# EAGLE board power system with extra pads (EAGLE 7.1.0)
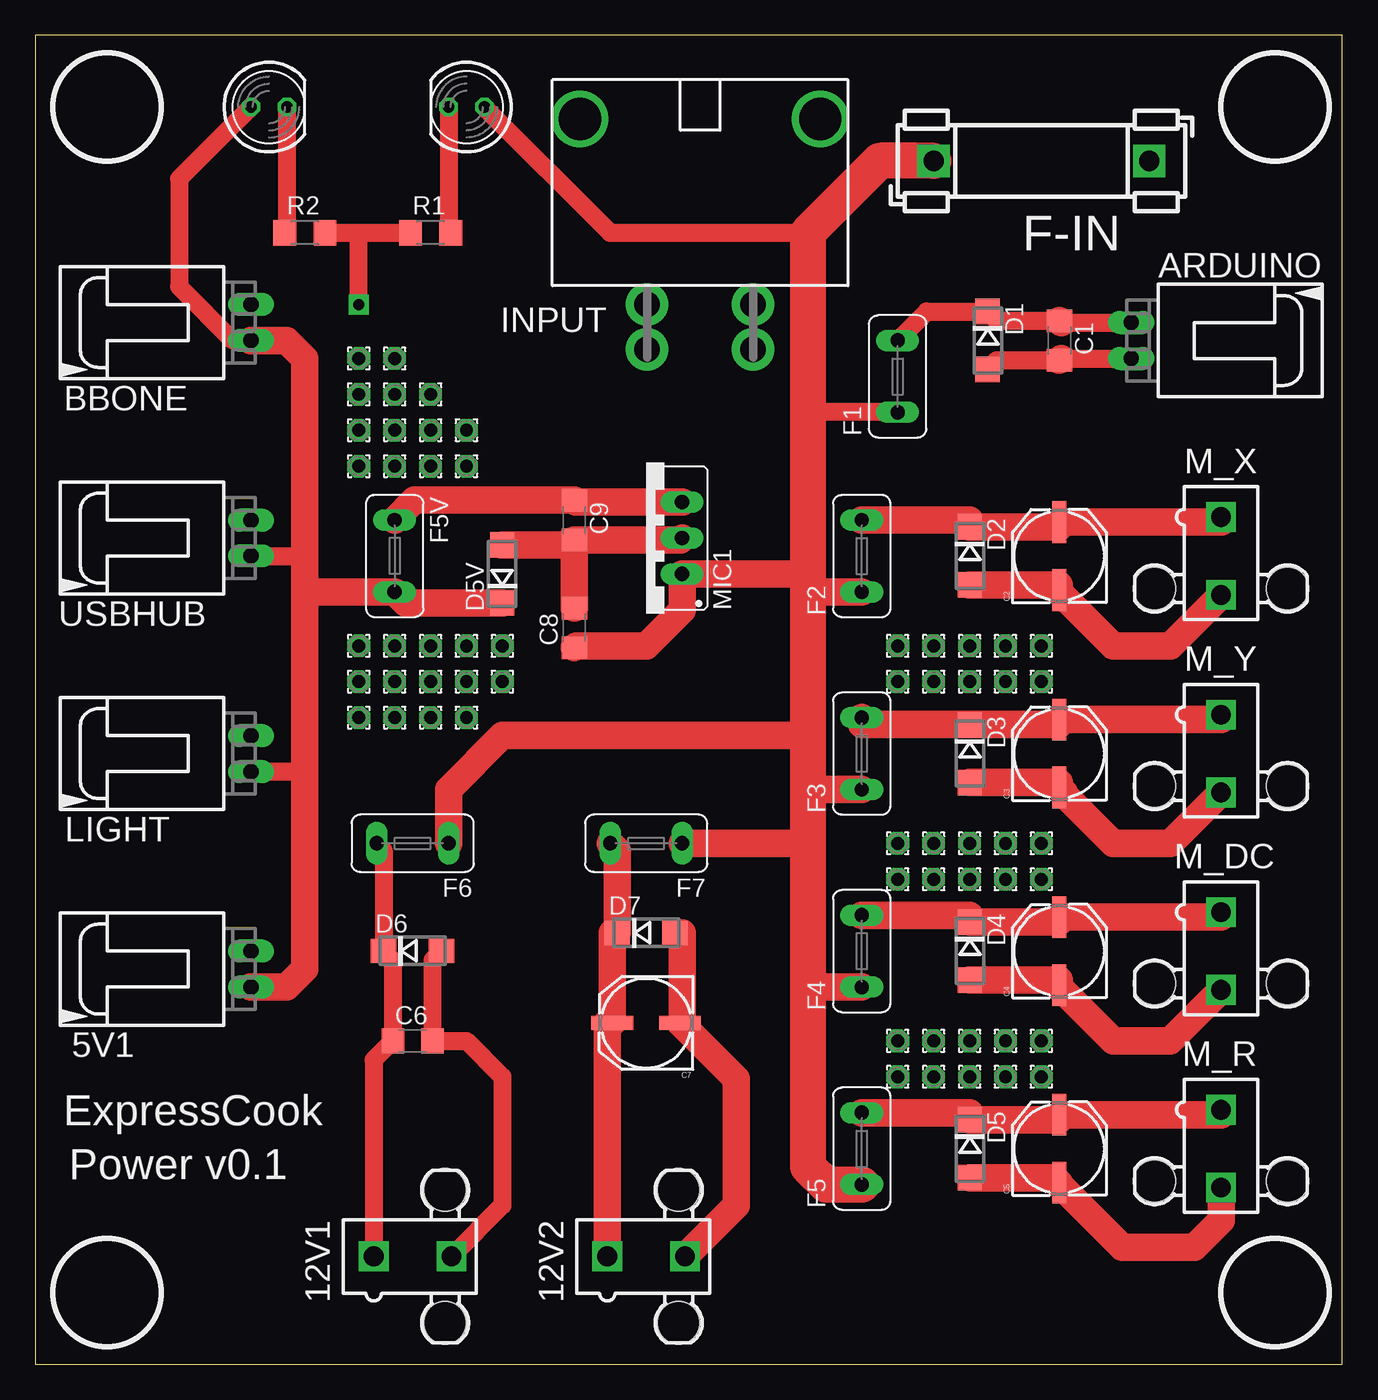
[diagram p0: board, top side]
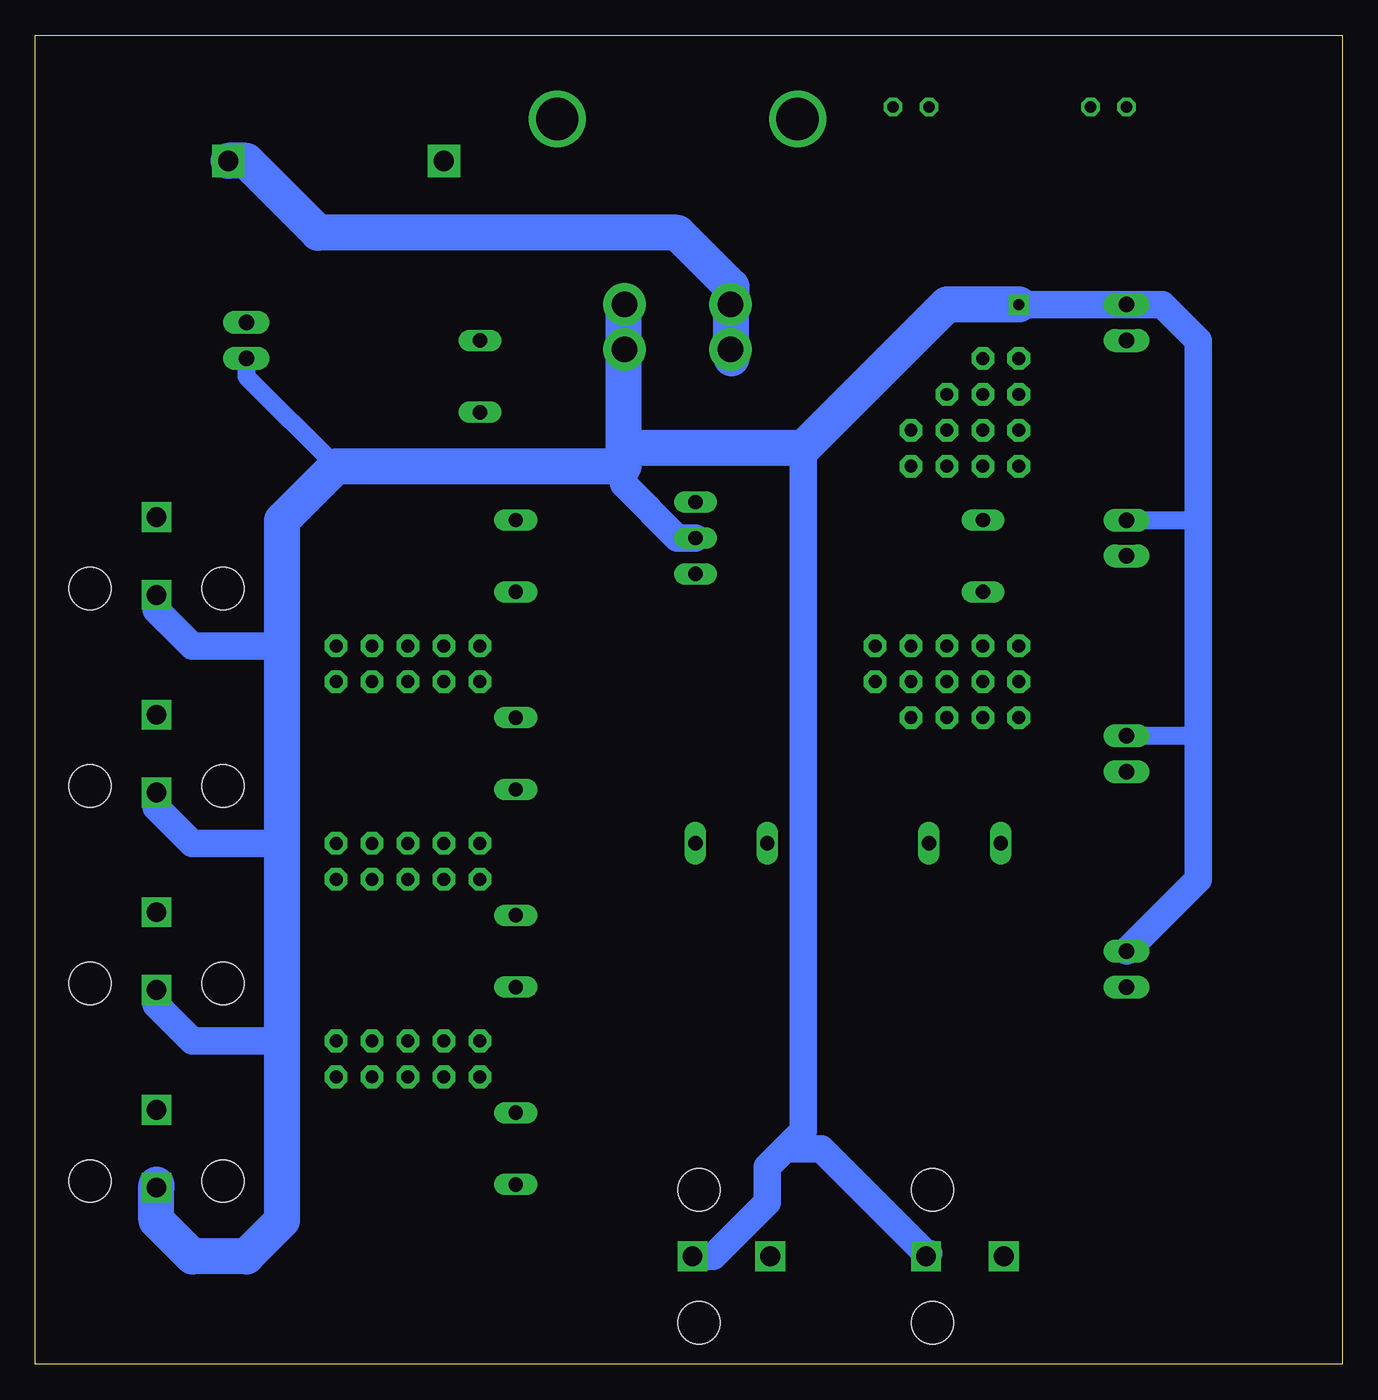
[diagram p1: board, bottom side, seen from below]

Size 92.38 x 93.97 mm. Coordinates in mm from the lower left corner, seen from the top.
Outline: 0,0 92.38,0 92.38,93.97 0,93.97 0,0
Copper layers (1*16): Top 0.035mm / dielectric 1.5mm / Bottom 0.035mm
Design rules "default": minimum track width 10mil, minimum drill 24mil, track to track 8mil, track to pad 8mil, pad to pad 8mil, via to via 8mil, smd to smd 8mil, copper to edge 40mil, drill to drill 8mil, minimum pad ring 10mil, minimum via ring 8mil, stop-mask expansion 4mil, vias tented up to drill 0mil, thermal gap 10mil

## Footprints (pad centres in the part's own frame; a part is rotated, then mirrored left to right if it is on the bottom)
70553-02 = drill 1.092 long: 1 -1.27,-7.62; 2 1.27,-7.62
5566-2 = drill 1.4 square: 1 0,-2.75; 2 0,2.75 | hole 3: 4.7,2.29; -4.7,2.29
C1206 = smd 1.6 x 1.8: 1 -1.4,0; 2 1.4,0
NIPPON_F80 = smd 2.95 x 1: + 2.4,0; - -2.4,0
DO214AC = smd 1.8 x 1.7: A 2.05,0; C -2.05,0
1,6/0,9 = drill 0.914 pad 1.6 octagon: 1 0,0
TE5 = drill 1.016 long: 1 -2.54,0; 2 2.54,0
FUSE_HOLDER_5X20MM = drill 1.422 pad 2.286 square: 1 0,0; 2 15.24,0
43160-XX02 = drill 1.8 pad 3: 1@1 -3.745,0; 1@2 -3.745,3.18; 2@1 3.745,0; 2@2 3.745,3.18 | drill 3 pad 3.4: M1 -8.495,-13.13; M2 8.495,-13.13
LED5MM = drill 0.813 octagon: A -1.27,0; K 1.27,0
TO220CS = drill 1.016 long: GND 0,-2.54; IN -2.54,-2.54; OUT 2.54,-2.54
R1206 = smd 1.6 x 1.803: 1 -1.422,0; 2 1.422,0

## Placement (x,y rotation side)
5V1  C-GRID-02-70553  [70553-02]  7.62,27.94 90 top
12V1  5566-2  [5566-2]  26.67,7.62 270 top
12V2  5566-2  [5566-2]  43.18,7.62 270 top
ARDUINO  C-GRID-02-70553  [70553-02]  85.09,72.39 270 top
BBONE  C-GRID-02-70553  [70553-02]  7.62,73.66 90 top
C1  10uF  [C1206]  72.39,72.39 270 top
C2  220uF  [NIPPON_F80]  72.39,57.15 90 top
C3  220uF  [NIPPON_F80]  72.39,43.18 90 top
C4  220uF  [NIPPON_F80]  72.39,29.21 90 top
C5  220uF  [NIPPON_F80]  72.39,15.24 90 top
C6  10uF  [C1206]  26.67,22.86 0 top
C7  220uF  [NIPPON_F80]  43.18,24.13 180 top
C8  0.2uF  [C1206]  38.1,52.07 90 top
C9  10uF  [C1206]  38.1,59.69 270 top
D1  12v  [DO214AC]  67.31,72.39 270 top
D2  12v  [DO214AC]  66.04,57.15 270 top
D3  12v  [DO214AC]  66.04,43.18 270 top
D4  12v  [DO214AC]  66.04,29.21 270 top
D5  12v  [DO214AC]  66.04,15.24 270 top
D5V  5v  [DO214AC]  33.02,55.88 90 top
D6  12v  [DO214AC]  26.67,29.21 0 top
D7  12v  [DO214AC]  43.18,30.48 0 top
E$1  [1,6/0,9]  22.86,50.8 0 top
E$2  [1,6/0,9]  25.4,50.8 0 top
E$3  [1,6/0,9]  27.94,50.8 0 top
E$4  [1,6/0,9]  30.48,50.8 0 top
E$5  [1,6/0,9]  33.02,50.8 0 top
E$6  [1,6/0,9]  33.02,48.26 0 top
E$7  [1,6/0,9]  30.48,48.26 0 top
E$8  [1,6/0,9]  27.94,48.26 0 top
E$9  [1,6/0,9]  25.4,48.26 0 top
E$10  [1,6/0,9]  22.86,48.26 0 top
E$11  [1,6/0,9]  22.86,45.72 0 top
E$12  [1,6/0,9]  25.4,45.72 0 top
E$13  [1,6/0,9]  27.94,45.72 0 top
E$14  [1,6/0,9]  30.48,45.72 0 top
E$15  [1,6/0,9]  60.96,36.83 0 top
E$16  [1,6/0,9]  60.96,34.29 0 top
E$17  [1,6/0,9]  63.5,34.29 0 top
E$18  [1,6/0,9]  63.5,36.83 0 top
E$19  [1,6/0,9]  66.04,36.83 0 top
E$20  [1,6/0,9]  66.04,34.29 0 top
E$21  [1,6/0,9]  68.58,34.29 0 top
E$22  [1,6/0,9]  68.58,36.83 0 top
E$23  [1,6/0,9]  71.12,36.83 0 top
E$24  [1,6/0,9]  60.96,22.86 0 top
E$25  [1,6/0,9]  63.5,22.86 0 top
E$26  [1,6/0,9]  66.04,22.86 0 top
E$27  [1,6/0,9]  68.58,22.86 0 top
E$28  [1,6/0,9]  71.12,22.86 0 top
E$29  [1,6/0,9]  71.12,20.32 0 top
E$30  [1,6/0,9]  68.58,20.32 0 top
E$31  [1,6/0,9]  66.04,20.32 0 top
E$32  [1,6/0,9]  63.5,20.32 0 top
E$33  [1,6/0,9]  60.96,20.32 0 top
E$34  [1,6/0,9]  22.86,71.12 0 top
E$35  [1,6/0,9]  25.4,71.12 0 top
E$36  [1,6/0,9]  22.86,68.58 0 top
E$37  [1,6/0,9]  25.4,68.58 0 top
E$38  [1,6/0,9]  27.94,68.58 0 top
E$39  [1,6/0,9]  22.86,66.04 0 top
E$40  [1,6/0,9]  25.4,66.04 0 top
E$41  [1,6/0,9]  27.94,66.04 0 top
E$42  [1,6/0,9]  30.48,66.04 0 top
E$43  [1,6/0,9]  22.86,63.5 0 top
E$44  [1,6/0,9]  25.4,63.5 0 top
E$45  [1,6/0,9]  27.94,63.5 0 top
E$46  [1,6/0,9]  30.48,63.5 0 top
E$47  [1,6/0,9]  71.12,34.29 0 top
E$48  [1,6/0,9]  60.96,50.8 0 top
E$49  [1,6/0,9]  60.96,48.26 0 top
E$50  [1,6/0,9]  63.5,48.26 0 top
E$51  [1,6/0,9]  63.5,50.8 0 top
E$52  [1,6/0,9]  66.04,50.8 0 top
E$53  [1,6/0,9]  66.04,48.26 0 top
E$54  [1,6/0,9]  68.58,48.26 0 top
E$55  [1,6/0,9]  68.58,50.8 0 top
E$56  [1,6/0,9]  71.12,50.8 0 top
E$57  [1,6/0,9]  71.12,48.26 0 top
F1  2A  [TE5]  60.96,69.85 90 top
F2  3A  [TE5]  58.42,57.15 90 top
F3  3A  [TE5]  58.42,43.18 90 top
F4  4A  [TE5]  58.42,29.21 90 top
F5  2A  [TE5]  58.42,15.24 90 top
F5V  5A  [TE5]  25.4,57.15 270 top
F6  2A  [TE5]  26.67,36.83 180 top
F7  2A  [TE5]  43.18,36.83 180 top
F-IN  15A  [FUSE_HOLDER_5X20MM]  78.74,85.09 180 top
INPUT  43160-1102  [43160-XX02]  46.99,74.93 180 top
LED  12v  [LED5MM]  30.48,88.9 180 top
LED2  5v  [LED5MM]  16.51,88.9 0 top
LIGHT  C-GRID-02-70553  [70553-02]  7.62,43.18 90 top
M_DC  5566-2  [5566-2]  83.82,29.21 180 top
M_R  5566-2  [5566-2]  83.82,15.24 180 top
M_X  5566-2  [5566-2]  83.82,57.15 180 top
M_Y  5566-2  [5566-2]  83.82,43.18 180 top
MIC1  MIC29300  [TO220CS]  43.18,58.42 90 top
R1  1200  [R1206]  27.94,80.01 0 top
R2  250  [R1206]  19.05,80.01 0 top
USBHUB  C-GRID-02-70553  [70553-02]  7.62,58.42 90 top

## Library data of the parts
5V1 ARDUINO BBONE LIGHT USBHUB = con-molex; OC_FARNELL: unknown; OC_NEWARK: unknown
12V1 12V2 M_DC M_R M_X M_Y = con-molex; OC_FARNELL: 1822072; OC_NEWARK: unknown
C1 C6 C8 C9 = resistor
C2-C5 C7 = SparkFun-Capacitors
D1-D5 D5V D6 D7 = diode
E$1-E$57 = wirepad
F1-F5 F5V F6 F7 F-IN = fuse; OC_FARNELL: unknown; OC_NEWARK: unknown
INPUT = con-molex; MF: WALDOM/MOLEX; MPN: 43160-1102; OC_FARNELL: unknown; OC_NEWARK: 54H0255
LED LED2 = led
MIC1 = Powerlib
R1 R2 = eagle-ltspice; SPICEMODEL: NONE; SPICEPREFIX: R

## Nets
GND: 5V1.2 12V1.2 12V2.2 ARDUINO.2 BBONE.2 C1.2 C2.- C3.- C4.- C5.- C6.2 C7.- C8.2 C9.2 D1.A D2.A D3.A D4.A D5.A D5V.A D6.A D7.A INPUT.1@1 LIGHT.2 M_DC.2 M_R.2 M_X.2 M_Y.2 MIC1.GND R1.1 R2.2 USBHUB.2
N$2: ARDUINO.1 C1.1 D1.C F1.2
N$3: F-IN.1 INPUT.2@1
N$4: C2.+ D2.C F2.2 M_X.1
N$5: 5V1.1 BBONE.1 D5V.C F5V.2 LED2.A LIGHT.1 USBHUB.1
N$6: C3.+ D3.C F3.2 M_Y.1
N$7: C9.1 F5V.1 MIC1.OUT
N$8: C8.1 F1.1 F2.1 F3.1 F4.1 F5.1 F6.1 F7.1 F-IN.2 LED.A MIC1.IN
N$9: LED2.K R2.1
N$12: C4.+ D4.C F4.2 M_DC.1
N$14: LED.K R1.2
N$15: C5.+ D5.C F5.2 M_R.1
N$17: 12V1.1 C6.1 D6.C F6.2
N$19: 12V2.1 C7.+ D7.C F7.2

## Tracks (layer width: path | path; a pad name or v marks a point on that pad's centre or on a via)
GND  (via drill 0.8 pad 1.42)
  Top 0.254: D7.A 45.72,30.48
  Top 1.27: D1.A 67.96,70.99 C1.2 | 72.52,71.12 ARDUINO.2 | D6.A 28.07,28.56 C6.2 30.48,22.86 33.02,20.32 33.02,11.22 12V1.2 | R2.2 22.86,80.01 | 22.86,80.01 R1.1 | v22.86,74.93 22.86,80.01
  Top 1.93: D2.A 72.39,55.1 C2.- 72.39,54.61 76.2,50.8 80.22,50.8 M_X.2 | D3.A 72.39,41.13 C3.- 72.74,40.43 72.74,40.29 76.2,36.83 80.22,36.83 M_Y.2 | D4.A 72.39,27.16 C4.- 72.39,26.67 76.2,22.86 80.22,22.86 M_DC.2 | 45.72,30.48 45.72,24.13 C7.- 49.53,20.18 49.53,11.22 12V2.2 | C1.2 72.52,71.12 | C8.2 C9.2 | D5V.A 37.74,57.93 C9.2 | C9.2 45.59,58.29 MIC1.GND | D5.A 72.04,13.19 C5.- 72.39,12.7 76.83,8.26 81.91,8.26 83.82,10.16 M_R.2
  Bottom 1.27: USBHUB.2 10.16,59.69 | LIGHT.2 10.16,44.45 | ARDUINO.2 77.47,69.85 71.12,63.5
  Bottom 1.93: MIC1.GND 46.99,58.42 50.8,62.23 50.8,63.5 50.8,64.77 | 5V1.2 10.16,34.29 10.16,44.45 10.16,59.69 10.16,72.39 12.7,74.93 BBONE.2 v22.86,74.93 | M_X.2 83.82,53.34 81.28,50.8 74.93,50.8 | M_Y.2 83.82,39.37 81.28,36.83 74.93,36.83 | M_DC.2 83.82,25.4 81.28,22.86 74.93,22.86 | 29.21,7.83 12V1.2 29.42,7.83 36.83,15.24 39.37,15.24 | 39.37,15.24 40.64,13.97 40.64,11.43 44.45,7.62 12V2.2 | 38.1,64.77 38.1,16.51 39.37,15.24
  Bottom 2.54: 83.82,12.7 M_R.2 83.82,10.16 81.28,7.62 77.47,7.62 74.93,10.16 74.93,22.86 74.93,36.83 74.93,50.8 74.93,59.69 71.12,63.5 50.8,63.5 | v22.86,74.93 27.94,74.93 38.1,64.77 50.8,64.77 50.8,74.87 INPUT.1@1
N$2
  Top 1.27: F1.2 63.01,74.44 D1.C 67.96,73.79 C1.1 | 72.52,73.66 ARDUINO.1
  Top 1.93: C1.1 72.52,73.66
N$3
  Bottom 2.54: F-IN.1 77.47,85.09 72.39,80.01 46.99,80.01 43.18,76.2 43.18,74.87 | 43.18,71.12 43.18,74.87 | 43.18,74.87 INPUT.2@1
N$4
  Top 1.93: M_X.1 83.82,59.55 C2.+ 72.39,59.2 D2.C 66.04,59.69 F2.2
N$5
  Top 1.27: USBHUB.1 19.05,57.15 | LIGHT.1 19.05,41.91 | LED2.A 10.16,83.82 10.16,76.2 13.97,72.39 BBONE.1
  Top 1.93: D5V.C 26.18,53.83 F5V.2 19.05,54.61 | 19.05,54.61 19.05,57.15 19.05,71.12 17.78,72.39 BBONE.1 | 19.05,54.61 19.05,41.91 19.05,27.94 17.78,26.67 5V1.1
N$6
  Top 1.93: M_Y.1 83.82,45.58 C3.+ 72.39,45.23 D3.C 58.42,45.23 F3.2
N$7
  Top 1.93: MIC1.OUT 38.23,60.96 C9.1 26.8,61.09 F5V.1
N$8
  Top 1.27: F1.1 54.61,67.31 | LED.A 40.64,80.01 54.61,80.01
  Top 1.93: C8.1 38.23,50.8 43.18,50.8 45.72,53.34 MIC1.IN 54.61,55.88 | F6.1 29.21,40.64 33.02,44.45 54.61,44.45 | F2.1 54.61,54.61 | F7.1 54.61,36.83 | F4.1 54.61,26.67 | F3.1 54.61,40.64
  Top 2.54: F5.1 55.88,12.7 54.61,13.97 54.61,26.67 54.61,36.83 54.61,40.64 54.61,44.45 54.61,54.61 54.61,55.88 54.61,67.31 54.61,80.01 59.69,85.09 F-IN.2
N$9
  Top 1.27: LED2.K 17.78,80.16 R2.1
N$12
  Top 1.93: M_DC.1 83.82,31.61 C4.+ 72.39,31.26 D4.C 66.04,31.75 F4.2
N$14
  Top 1.27: LED.K 29.21,80.16 R1.2
N$15
  Top 0.254: M_R.1 83.8,18.14 83.8,17.64
  Top 1.93: 83.82,17.78 83.82,17.64 83.8,17.64 C5.+ 72.39,17.29 D5.C 66.04,17.78 F5.2
N$17
  Top 1.27: F6.2 24.62,36.34 D6.C 25.27,28.56 C6.1 23.92,21.51 12V1.1
N$19
  Top 1.93: 12V2.1 40.43,24.13 C7.+ 40.78,30.48 D7.C 41.13,36.34 F7.2

## Text on the board
tPlace: ExpressCook | Power v0.1